# Altium PCB final_pcb.PcbDoc
Units mm, origin at the board's own origin, x right, y up, seen from the top; angles counter-clockwise.
Board outline 101.6 x 75.44 mm, 2 copper layers (Top Layer, Bottom Layer); 25 components, 40 nets, 169 pads, 27 vias.
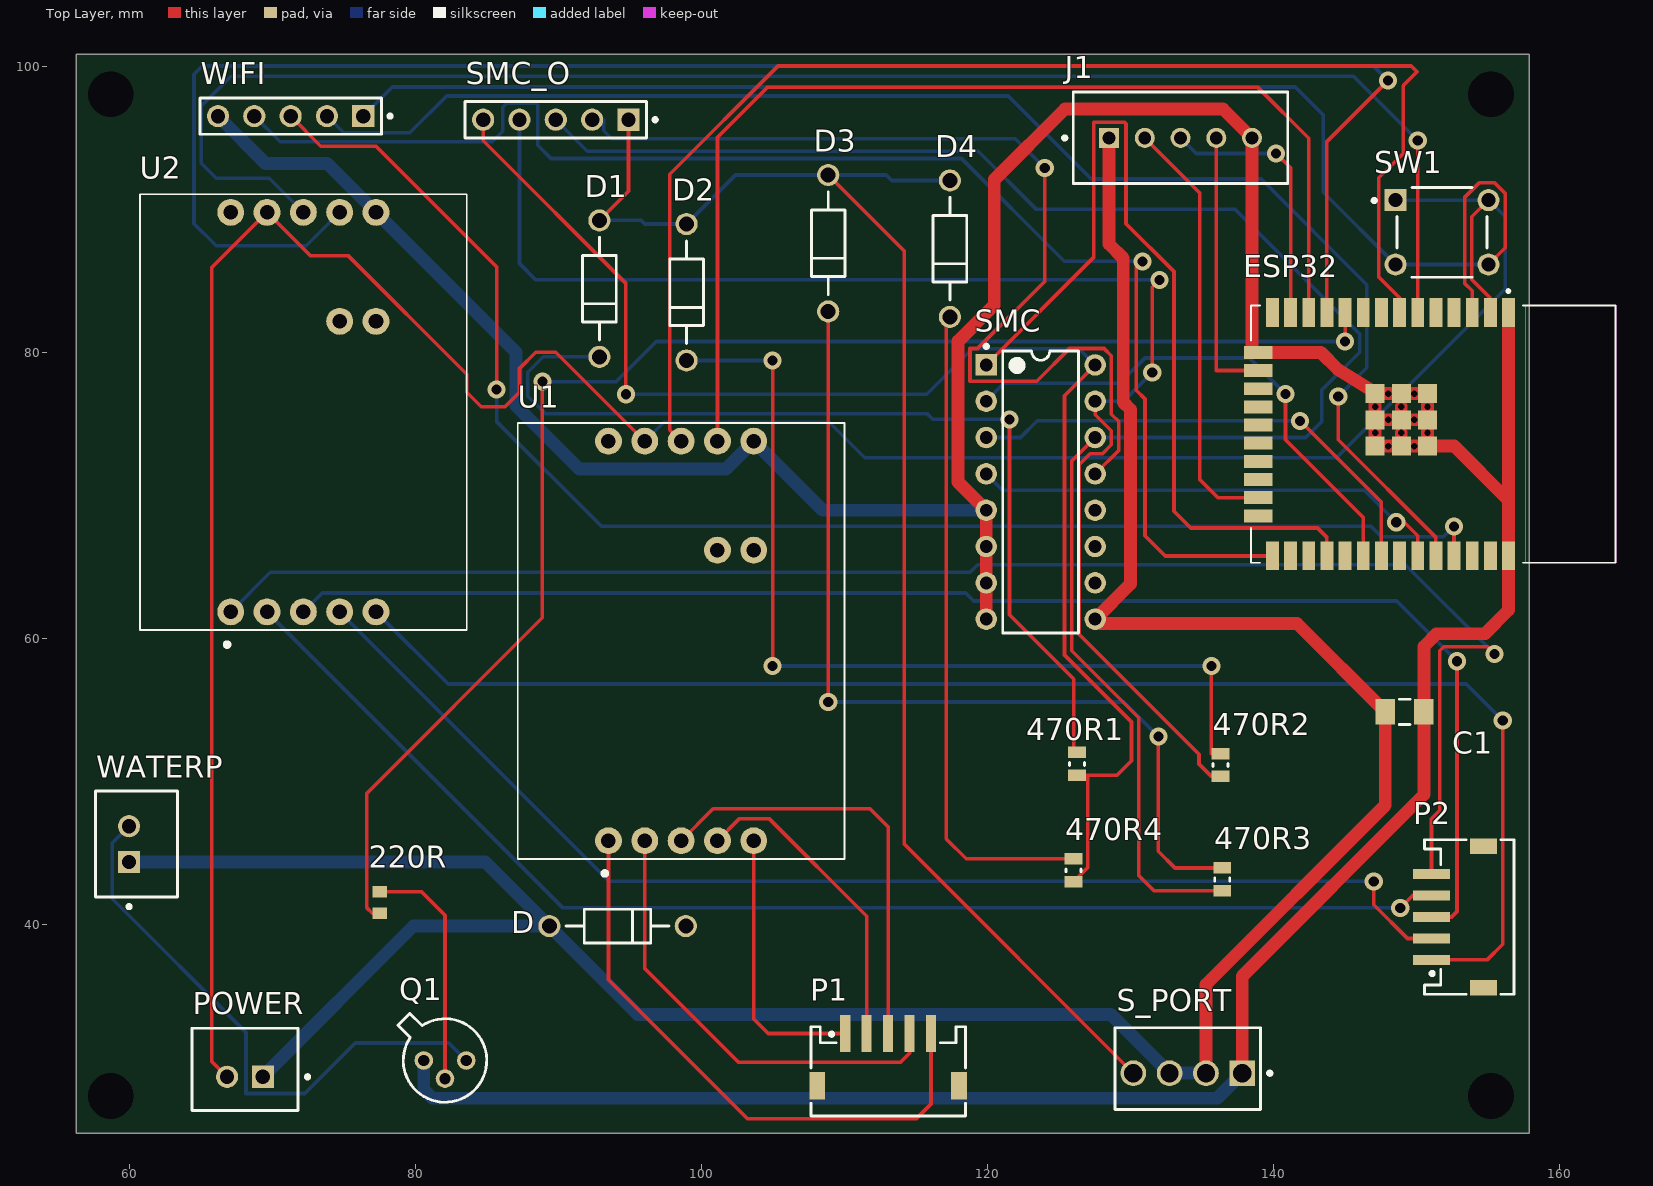
[diagram p0: Top Layer view]
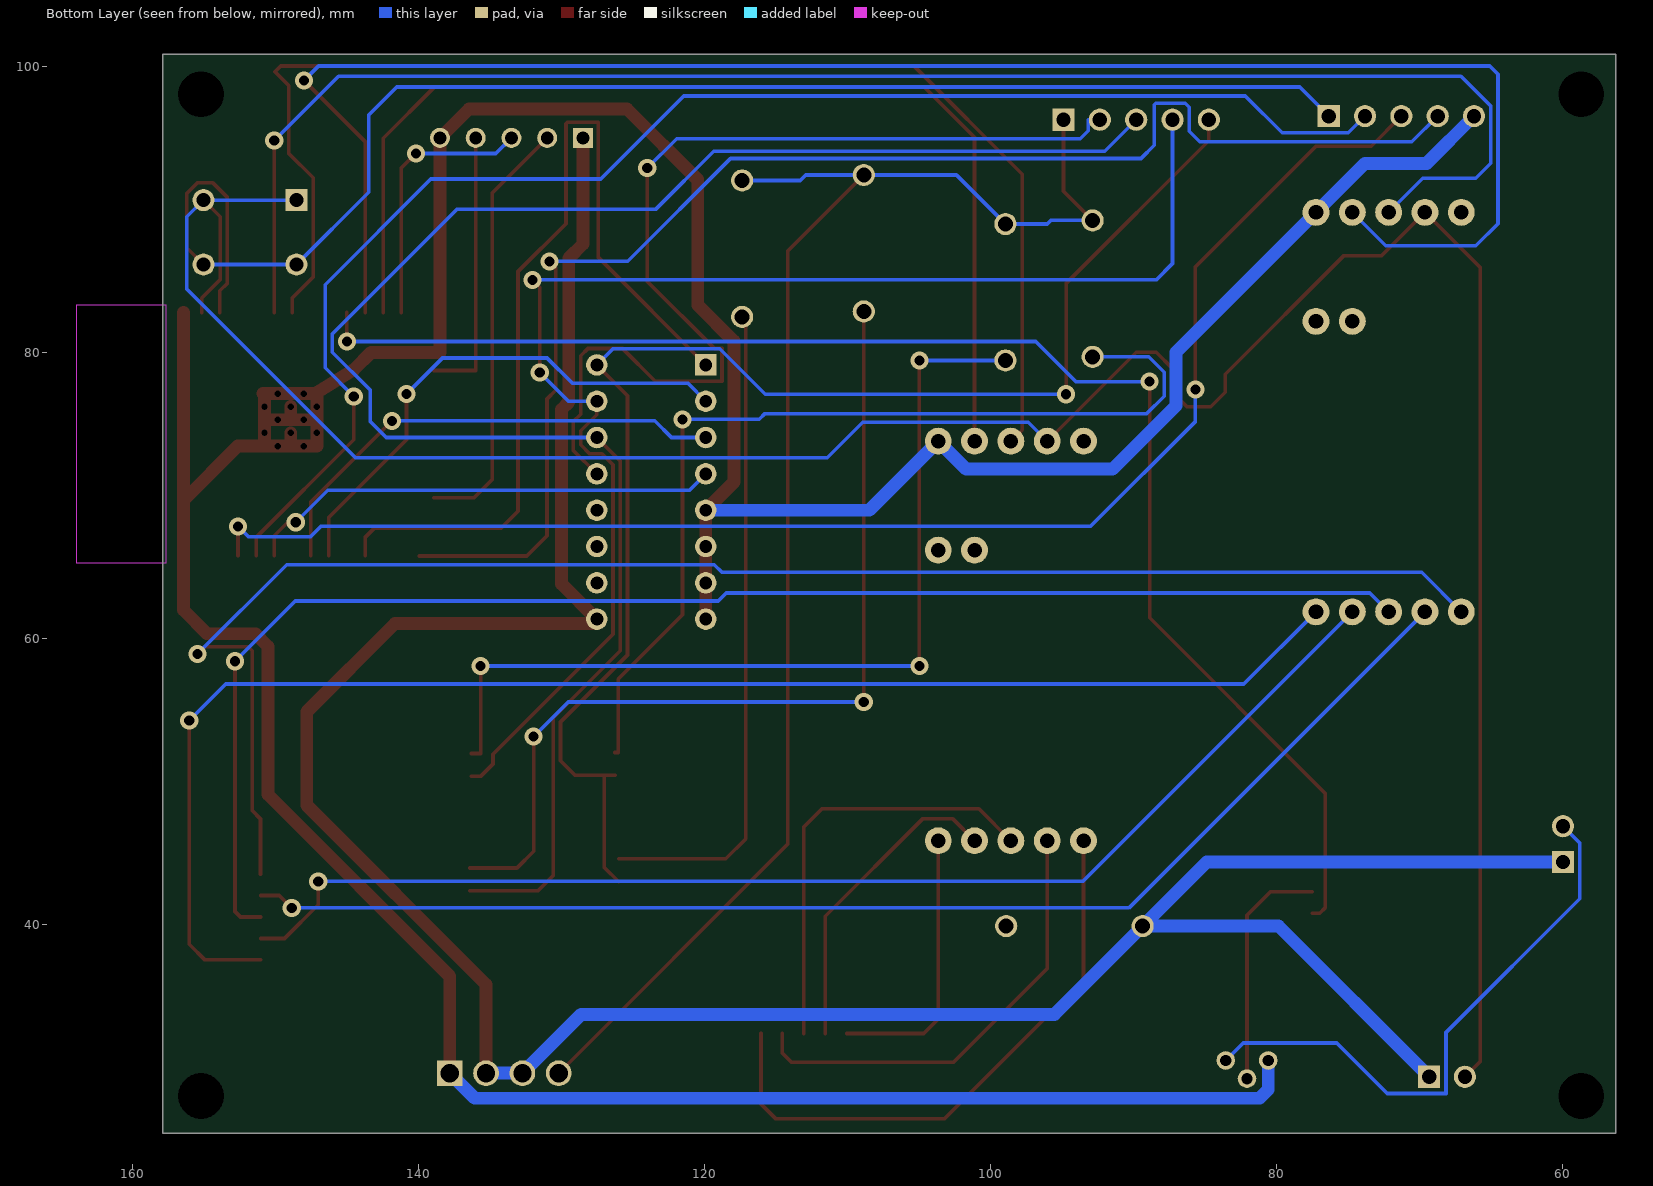
[diagram p1: Bottom Layer view, seen from below]
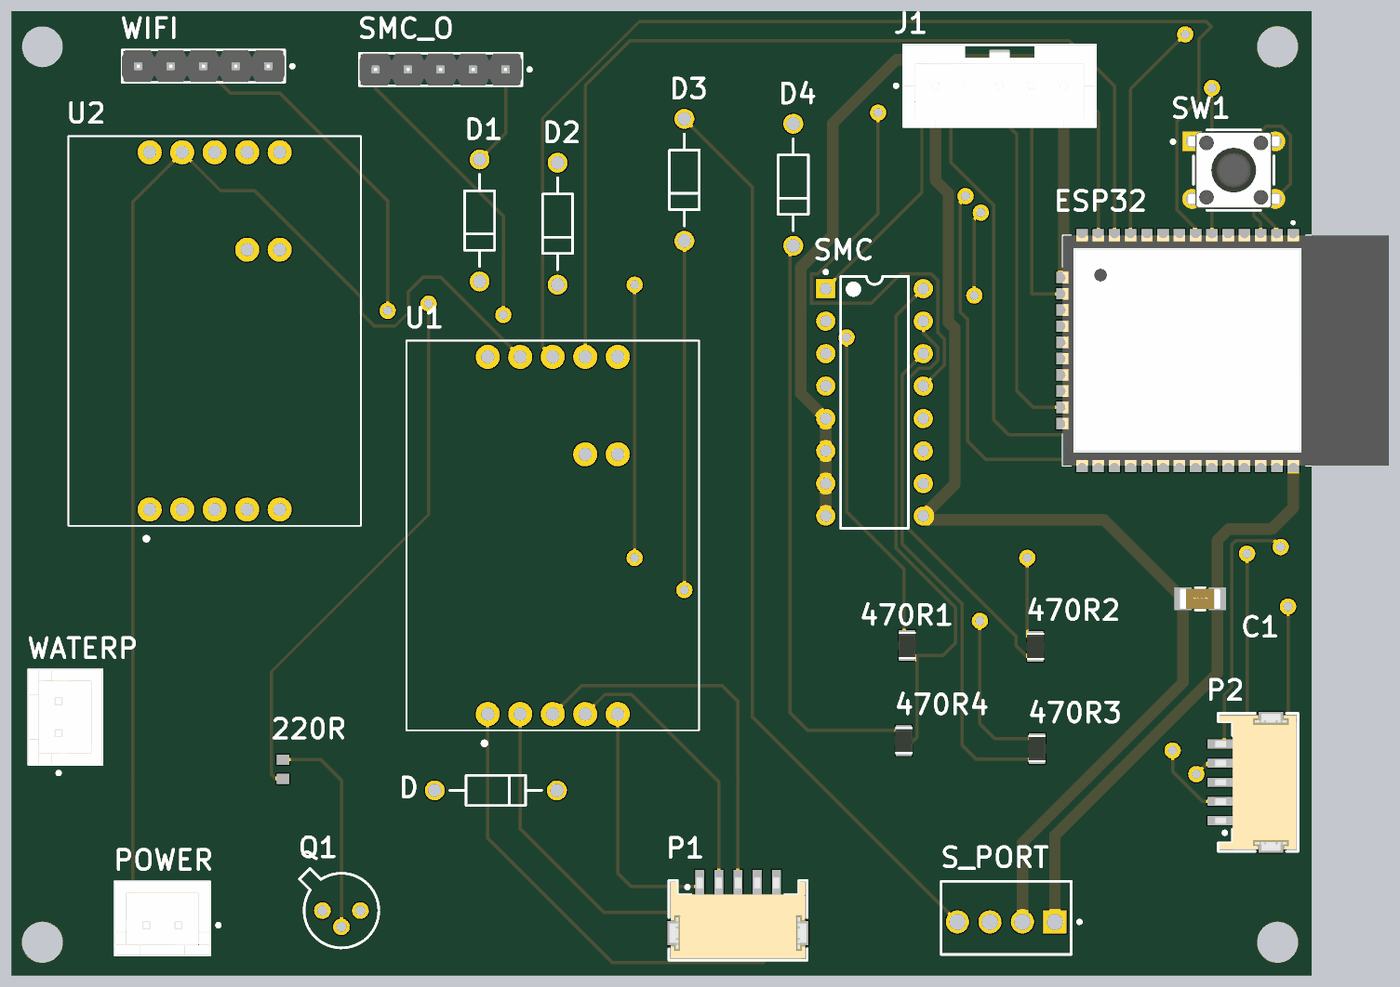
[diagram p2: 3D render of the assembled board from above, using the file's embedded part models]

## Layer stack, top to bottom
Top Solder: solder mask 0.0102, Solder Resist, Dk 3.5
Top Layer: signal copper 0.0356
Dielectric 1: dielectric 0.32, FR-4, Dk 4.8
Bottom Layer: signal copper 0.0356
Bottom Solder: solder mask 0.0102, Solder Resist, Dk 3.5

## Board outline
56.261,25.4 157.861,25.4 157.861,100.838 56.261,100.838

## Design rules (kind name [scope] priority, off if disabled: settings)
Clearance [All] p1: gap=0.254 ignorepadtopadclearanceinfootprint=FALSE
HoleSize [All] p1: absolutevalues=TRUE maxlimit=3.4 minlimit=0.45 maxpercent=80.000 minpercent=20.000
MinimumSolderMaskSliver [All] p1: minsoldermaskwidth=0.1
PolygonConnect [All] p1: connectstyle=Relief reliefconductorwidth=0.254 reliefentries=4 polygonreliefangle="90 Angle" airgapwidth=0.254
RoutingVias [All] p1: holewidth=0.711 width=1.27 viastyle="Through Hole" minholewidth=0.711 minwidth=1.27 maxholewidth=0.711 maxwidth=1.27
SilkToSolderMaskClearance [IsPad] p1: minsilkscreentomaskgap=0.15 clearancetoexposedcopper=TRUE
SolderMaskExpansion [All] p1: expansion=0.102 istentingtop=FALSE
SupplyNets "Schematic Supply Nets_2" [InNet('GND')] p1: voltage=0.000
SupplyNets "Schematic Supply Nets_1" [InNet('VCC')] p2: voltage=0.000
SupplyNets "Schematic Supply Nets" [InNet('3V3')] p3: voltage=0.000
Width Width_1 [InNet('GND')] p1: maxlimit=1 minlimit=0.254 preferedwidth=0.9 minimp=50.000000 maximp=50.000000 favimp=50.000000
Width VCC_Width [InNet('VCC')] p2: maxlimit=1.3 minlimit=0.5 preferedwidth=0.9 minimp=50.000000 maximp=50.000000 favimp=50.000000
Width [All] p3: maxlimit=1.3 minlimit=0.254 preferedwidth=0.254 minimp=50.000000 maximp=50.000000 favimp=50.000000
27 further rules are at their usual default settings.

## Components (designator, comment, footprint, x,y, rotation, side; value= is the part's Value field where it differs from the comment)
220R "RC0603FR-07220RL" RESC1608X55X25ML10T15 77.47,41.529 r90 top
470R1 "RC0805FR-07470RL" RESC2013X60X35LL10T20 126.238,51.219 r90 top
470R2 "RC0805FR-07470RL" RESC2013X60X35LL10T20 136.271,51.143 r90 top
470R3 "RC0805FR-07470RL" RESC2013X60X35LL10T20 136.398,43.142 r90 top
470R4 "RC0805FR-07470RL" RESC2013X60X35LL10T20 125.984,43.777 r90 top
C1 "EMK316BJ106MLHT" FP-1206-L_3_2_0_15-W_1_6-IPC_B 149.144,54.864 r0 top
D "1N4004" ONSC-AXIAL_LEAD-2-59-10_P 94.107,39.878 r180 top
D1 "1N4004" ONSC-AXIAL_LEAD-2-59-10_P 92.837,84.455 r90 top
D2 "1N4004" ONSC-AXIAL_LEAD-2-59-10_P 98.933,84.201 r90 top
D3 "1N4004" ONSC-AXIAL_LEAD-2-59-10_P 108.839,87.63 r90 top
D4 "1N4004" ONSC-AXIAL_LEAD-2-59-10_P 117.348,87.249 r90 top
ESP32 "ESP32-WROOM-32" MODULE_ESP32-WROOM-32 151.154,74.282 r270 top
J1 "B05B-XASK-1(LF)(SN)" FP-B05B-XASK-1_LF_SN-MFG 133.477,94.996 r180 top
P1 "648105131822" 648105131822 113.03,29.718 r0 top
P2 "648105131822" 648105131822 153.67,40.513 r90 top
POWER "B2B-XH-A(LF)(SN)" FP-B2B-XH-A_LF_SN-MFG 68.052,29.862 r180 top
Q1 "2N2222" MLTC-TO-18-3 82.042,30.48 r0 top
S_PORT "640456-4" TECO-640456-4 133.985,29.591 r0 top
SMC "ULN2003A" STM-DIP-16L 123.698,70.231 r0 top
SMC_O "90120-0125" FP-90120-0125-MFG 89.789,96.266 r180 top
SW1 "3-1825910-1" FP-3-1825910-1-MFG 151.765,88.392 r0 top
U1 "SEN-13879" SPARKFUN_SEN-13879 98.552,59.817 r90 top
U2 "SEN-13879" SPARKFUN_SEN-13879 72.136,75.819 r90 top
WATERP "B2B-XH-A(LF)(SN)" FP-B2B-XH-A_LF_SN-MFG 60.469,45.613 r90 top
WIFI "90120-0125" FP-90120-0125-MFG 71.247,96.52 r180 top

## Footprints (in the part's own frame and the unit in brackets; to place one, negate y for a bottom-side part, rotate by r counter-clockwise, add the part's x,y. Pads: shape width x height; smd on the part's side, far side on the other; paste and mask are expansions set on the pad)
648105131822 [mm] "1.50mm SMT Male Horizontal Shrouded Header, 5p"
  rect 0.7x2.6 smd: 1(-3,2.65) 2(-1.5,2.65) 3(0,2.65) 4(1.5,2.65) 5(3,2.65)
  rect 1.1x1.9 smd: MP1(-4.95,-1) MP2(4.95,-1)
  silkscreen extent -5.4,-3.13 5.4,3.13, body extent -5.35,-3 5.35,3.47, height 3.74
FP-3-1825910-1-MFG [mm]
  rect 1.54x1.54 hole 0.99 paste-2539.97 mask+0: 1(-3.25,2.25)
  round 1.54 hole 0.99 paste-2539.97 mask+0: 2(3.25,2.25) 3(-3.25,-2.25) 4(3.25,-2.25)
  silkscreen extent -4.87,-3.14 3.14,3.14, body extent -4.12,-3.24 4.12,3.24, height 0.25
FP-1206-L_3_2_0_15-W_1_6-IPC_B [mm]
  rect 1.355x1.758 smd paste+0 mask+0: 1(-1.351,0) 2(1.351,0)
  silkscreen extent -0.37,-0.88 0.37,0.88, body extent -2.28,-1.13 2.28,1.13, height 0.25
FP-90120-0125-MFG [mm]
  rect 1.55x1.55 hole 1 paste-2539.97 mask+0: 1(-5.08,0)
  round 1.55 hole 1 paste-2539.97 mask+0: 2(-2.54,0) 3(0,0) 4(2.54,0) 5(5.08,0)
  silkscreen extent -7.07,-1.27 6.35,1.27, body extent -6.45,-1.37 6.45,1.37, height 0.25
FP-B2B-XH-A_LF_SN-MFG [mm]
  rect 1.55x1.55 hole 1 paste-2539.97 mask+0: 1(-1.25,0.525)
  round 1.55 hole 1 paste-2539.97 mask+0: 2(1.25,0.525)
  silkscreen extent -4.5,-2.87 3.7,2.88, body extent -3.8,-2.98 3.8,2.98, height 0.25
FP-B05B-XASK-1_LF_SN-MFG [mm]
  rect 1.4x1.4 hole 0.9 paste-2539.97 mask+0: 1(5,0)
  round 1.4 hole 0.9 paste-2539.97 mask+0: 2(2.5,0) 3(0,0) 4(-2.5,0) 5(-5,0)
  silkscreen extent -7.5,-3.2 8.22,3.2, body extent -7.6,-3.3 7.6,3.3, height 0.25
MLTC-TO-18-3 [mm] "TO-18, 3-Leads"
  round 1.3 hole 0.8: 1(-1.485,0) 2(0,-1.27) 3(1.485,0)
  silkscreen extent -3.29,-2.92 2.92,3.29, body extent -3.29,-2.93 2.93,3.29, height 5.33
MODULE_ESP32-WROOM-32 [mm]
  rect 2x0.9 smd: 1(-8.5,5.26) 2(-8.5,3.99) 3(-8.5,2.72) 4(-8.5,1.45) 5(-8.5,0.18) 6(-8.5,-1.09) 7(-8.5,-2.36) 8(-8.5,-3.63) 9(-8.5,-4.9) 10(-8.5,-6.17) 11(-8.5,-7.44) 12(-8.5,-8.71) 13(-8.5,-9.98) 14(-8.5,-11.25) 25(8.5,-11.25) 26(8.5,-9.98) 27(8.5,-8.71) 28(8.5,-7.44) 29(8.5,-6.17) 30(8.5,-4.9) 31(8.5,-3.63) 32(8.5,-2.36) 33(8.5,-1.09) 34(8.5,0.18) 35(8.5,1.45) 36(8.5,2.72) 37(8.5,3.99) 38(8.5,5.26)
  rect 0.9x2 smd: 15(-5.715,-12.25) 16(-4.445,-12.25) 17(-3.175,-12.25) 18(-1.905,-12.25) 19(-0.635,-12.25) 20(0.635,-12.25) 21(1.905,-12.25) 22(3.175,-12.25) 23(4.445,-12.25) 24(5.715,-12.25)
  rect 1.33x1.33 smd: 39_1(-2.835,-0.405) 39_2(-1,-0.405) 39_3(0.835,-0.405) 39_4(-2.835,-2.24) 39_5(-1,-2.24) 39_6(0.835,-2.24) 39_7(-2.835,-4.075) 39_8(-1,-4.075) 39_9(0.835,-4.075)
  round 0.3 hole 0.45: 39_10(-1.918,-0.405) 39_11(-0.083,-0.405) 39_12(-2.835,-1.323) 39_13(-1,-1.323) 39_14(0.835,-1.323) 39_15(-1.918,-2.24) 39_16(-0.083,-2.24) 39_17(-2.835,-3.158) 39_18(-1,-3.158) 39_19(0.835,-3.158) 39_20(-1.918,-4.075) 39_21(-0.083,-4.075)
  Keep-Out Layer region: 9,6.45 -9,6.45 -9,12.75 9,12.75
  Keep-Out Layer region: 9,6.45 -9,6.45 -9,12.75 9,12.75
  silkscreen extent -10.1,-12.75 9,12.75, body extent -9,-12.75 9,12.75, height 3.2
ONSC-AXIAL_LEAD-2-59-10_P [mm] "AXIAL, 2-Leads, Diameter 2.35mm"
  round 1.55 hole 1.05: 1(-4.77,0) 2(4.77,0)
  silkscreen extent -3.6,-1.18 3.6,1.18
RESC1608X55X25ML10T15 [mm] "Chip Resistor, 2-Leads, Body 1.70x0.90mm, IPC Low Density"
  rect 0.8x1 smd: 1(-0.75,0) 2(0.75,0)
  body extent -0.85,-0.45 0.85,0.45, height 0.55
RESC2013X60X35LL10T20 [mm] "Chip Resistor, 2-Leads, Body 2.1x1.35mm, IPC High Density"
  rect 0.8x1.25 smd: 1(-0.8,0) 2(0.8,0)
  silkscreen extent -0.1,-0.53 0.1,0.53, body extent -1.05,-0.67 1.05,0.68, height 0.6
SPARKFUN_SEN-13879 [mil]
  round 74 hole 40: 1(-550,200) 2(-550,100) 3(-550,0) 4(-550,-100) 5(-550,-200) 6(550,-200) 7(550,-100) 8(550,0) 9(550,100) 10(550,200) 11(250,-100) 12(250,-200)
  silkscreen extent -646,-450 600,450
STM-DIP-16L [mm] "DIP, 16-Leads, Body 19.7x7.1mm, Pitch 2.54mm"
  rect 1.5x1.5 hole 0.9: 1(-3.81,8.89)
  round 1.5 hole 0.9: 2(-3.81,6.35) 3(-3.81,3.81) 4(-3.81,1.27) 5(-3.81,-1.27) 6(-3.81,-3.81) 7(-3.81,-6.35) 8(-3.81,-8.89) 9(3.81,-8.89) 10(3.81,-6.35) 11(3.81,-3.81) 12(3.81,-1.27) 13(3.81,1.27) 14(3.81,3.81) 15(3.81,6.35) 16(3.81,8.89)
  silkscreen extent -3.93,-9.85 2.65,10.31, body extent -3.95,-9.85 3.95,9.85, height 5.33
TECO-640456-4 [mm] "Through Hole, 4-Leads, Body 10.16x5.72mm, Pitch 2.54mm"
  rect 1.8x1.8 hole 1.27 paste-2539.97: 1(3.81,0)
  round 1.8 hole 1.27 paste-2539.97: 2(1.27,0) 3(-1.27,0) 4(-3.81,0)
  silkscreen extent -5.08,-2.54 5.86,3.18, body extent -5.08,-2.54 5.08,3.18, height 10.03

## Part data
220R: library part CMP-1659-00018-2, "General Purpose Chip Resistors, 220 Ohm, +/- 1%, -55 to 155 degC, 0603 (1608 Metric), RoHS, Tape and Reel", ComponentLink1Description="Manufacturer URL", ComponentLink1URL=http://www.yageo.com/, ComponentLink2Description=Datasheet, ComponentLink2URL=https://datasheet.ciiva.com/11808/0900766b80f96399-11808136.pdf, DatasheetVersion="Rev. 4, 04/2009", PackageDescription="2-Pin Surface Mount Device, Body 1.6 x 0.8 mm", PackageReference=0603, RoHSCompliant=false
470R1 470R2 470R3 470R4: library part CMP-2000-06961-1, "Chip Resistor, 470 Ohm, +/- 1%, 125 mW, -55 to 155 degC, 0805 (2012 Metric), RoHS, Tape and Reel", Manufacturer=Yageo, Package Description="2-Pin Surface Mounted Device, Body 2 x 1.25 mm", Package Reference=0805, Power Rating=250mW, Resistance=470ohm, Resistance Tolerance=±1%, Resistor Case Style=0805[2012Metric], Resistor Element Type=ThickFilm, Temperature Coefficient=±100ppm/°C, Voltage Rating=150V, Automotive Qualification Standard=-, Datasheet URL=http://www.yageo.com/documents/recent/PYu-RC_Group_51_RoHS_L_7.pdf, Datasheet Version="Rev. 7, 05/2017", Manufacturer URL=http://www.yageo.com/, Mounting Technology=SurfaceMount, MSL=MSL1-Unlimited, Packaging=Tape&Reel, Product Range=-, SVHC=ToBeAdvised
C1: library part CMP-14477-003677-2, "None"
D D1 D2 D3 D4: library part CMP-0902-00115-1, "Standard Recovery Rectifier, 2-Pin Axial_Lead, Pb-Free, Bulk Bag", Manufacturer="On Semiconductor", ComponentLink1Description="Manufacturer URL", ComponentLink1URL=http://www.onsemi.com/, ComponentLink2Description=Datasheet, ComponentLink2URL=http://www.onsemi.com/pub_link/Collateral/1N4001-D.PDF, ComponentLink3Description="Package Specification", ComponentLink3URL=http://www.onsemi.cn/pub_link/Collateral/59-10.PDF, DatasheetVersion="Rev. 13", IFSM Max (A)=30, IO(rec) Max (A)=1, Mounting Technology="Through Hole", PackageDescription="2-Pin, Axial Lead, Diameter 2.35 mm", PackageReference=AXIAL_LEAD-2-59-10, PackageVersion="Rev. U, 02/2005", Packing="Bulk Bag", PartNumber=1N4004, RoHS=TRUE, Type="Standard Recovery", VRRM Max (V)=400
ESP32: "Bluetooth, WiFi 802.11b/g/n, Bluetooth v4.2 +EDR, Class 1, 2 and 3 Transceiver Module 2.4GHz ~ 2.5GHz Antenna Not Included, U.FL Surface Mount", Package="Module Espressif Systems", Availability="In Stock", Check_prices=https://www.snapeda.com/parts/ESP32-WROOM-32/Espressif+Systems/view-part/?ref=eda, MF="Espressif Systems", MP=ESP32-WROOM-32, Price=None, Purchase-URL=https://pricing.snapeda.com/search/part/ESP32-WROOM-32/?ref=eda, SnapEDA_Link=https://www.snapeda.com/parts/ESP32-WROOM-32/Espressif+Systems/view-part/?ref=snap
J1: library part CMP-17439-000118-1, "CONN HEADER VERT 5POS 2.5MM", Color=Beige, Contact Resistance=10mR, Current Rating=3A, Flammability Rating="UL94 V-0", Insulation Color=Natural, Insulation Resistance=1GR, Max Operating Temperature=85°C, Min Operating Temperature=-25°C, Voltage Rating=250V, Connector Type=Header, Contact Finish - Mating=TIN, Contact Material="Copper Alloy", Contact Plating=Tin, Contact Shape=Circular, Contact Type="Male Pin", Fastening Type=Ramp, Gender=Male, Height=8.8mm, Insulation Material=Nylon, Lead Free="Lead Free", Lead Length=3.4mm, Length=15mm, Mated Stacking Heights=11.3mm, Material=Nylon, Mount="Through Hole", Number of Contacts=5, Number of Pins=5, Number of Poles=5, Number of Positions=5, Number of Rows=1, Orientation=Straight, Packaging=Bulk, Pitch=2.5mm, REACH SVHC="No SVHC", Series=XA, Termination=Solder, Voltage Rating (AC)=250V, Voltage Rating (DC)=250V, Width=6.4mm, Wire/Cable Gauge=20AWG
P1 P2: library part CMP-1502-00733-2, Color="Beige, White", Contact Resistance=20mΩ, Current Rating=1A, Flammability Rating="UL94 V-0", Insulation Resistance=500MΩ, Max Operating Temperature=85°C, Min Operating Temperature=-25°C, Operating Supply Voltage=50V, Connector Type="Male Pin", Contact Gender=Male, Contact Material=Copper, Contact Plating=Tin, Gender=Male, Height=3.7mm, Housing Material=Nylon, Lead Pitch=1.5mm, Length=10.5mm, Mount="Surface Mount", NexarPartId=18818254, Number of Contacts=5, Number of Pins=5, Number of Positions=5, Number of Rows=1, Packaging="Tape and Reel", Pitch=1.5mm, REACH SVHC=Unknown, RoHS=Compliant, Termination=Solder, Voltage Rating=50V, Width=10.5mm
POWER WATERP: library part CMP-2000-05888-3, "CONN HEADER VERT 2POS 2.5MM", Color=Natural, Contact Resistance=20mR, Current Rating=3A, Housing Color=White, Insulation Resistance=1GR, Max Operating Temperature=85°C, Max Voltage Rating (AC)=250V, Min Operating Temperature=-25°C, Connector Type="Male Pin", Contact Material=Brass, Contact Plating=Tin, Contact Type="Male Pin", Depth=5.75mm, Fastening Type=Detent, Housing Material=Polyamide, Lead Free="Lead Free", Lead Pitch=2.5mm, Length=7.4mm, Max Current Rating=3A, Max Voltage Rating (DC)=250V, Mount="Through Hole", Number of Contacts=2, Number of Positions=2, Number of Rows=1, Orientation=Straight, Packaging=Bulk, Pitch=2.5mm, REACH SVHC="No SVHC", Series=XH, Termination=Solder, Voltage Rating=250V, Voltage Rating (AC)=250V, Wire/Cable Gauge=22AWG
Q1: library part CMP-2000-05237-1, "Low Power Bipolar NPN Transistor, 30 V, -65 to 200 degC, 3-Pin TO-18, RoHS, Bulk", Collector Emitter Voltage V(br)ceo=30V, Collector Emitter Voltage Vces=400mV, Continuous Collector Current Ic Max=800mA, Current Ic @ Vce Sat=150mA, DC Current Gain hFE=100, Full Power Rating Temperature=25degC, Manufacturer=Multicomp, Package / Case=TO-18, Package Description="3-Pin Transistor Outline Package (TO-18), Dia 5.54 mm, Pitch Pitch 1.485mm", Package Reference=TO-18-3, Power Dissipation Pd=500mW, Voltage Vcbo=60V, Current Ic Continuous a Max=800mA, Current Ic hFE=150mA, Datasheet URL=http://www.farnell.com/datasheets/1662272.pdf, Datasheet Version="Rev. 1.1, 05/2012", DC Collector Current=800mA, Gain Bandwidth ft Min=250MHz, Gain Bandwidth ft Typ=250MHz, Hfe Min=100, Manufacturer URL=http://uk.farnell.com/b/multicomp, No. of Pins=3, No. of Transistors=1, Pin Configuration=a, Power Dissipation Ptot Max=500mW, SVHC=NoSVHC(19-Dec-2012), Transistor Case Style=TO-18, Transistor Polarity=NPN
S_PORT: library part CMP-2000-05419-1, "Male Header, Pitch 2.54 mm, 1 x 4 Position, Height 10.03 mm, Tail Length 3.56 mm, RoHS, Bulk", Color=White, Current, Rating="5 /  / A", Flammability Rating=UL94V-0, Manufacturer="TE Connectivity", Temperature, Operating="-55to+105 /  / degC", Voltage, Rating="250 /  / V", Agency Approvals=CSA,UL, Angle=Straight, Brand/Series=MTA-100Series, Color, Housing=White, Connector Type=MTA-100, Contact Centerline Spacing="0.100 /  / in.", Contact Mating Area Plating=Tin, Contact Plating=Tin, Contact Shape=Square, Contact Termination Area Plating=Tin, Datasheet URL=https://datasheet.ciiva.com/16286/eng-ds-82056-mta-0608-16286228.pdf, Datasheet Version=Dec-14, Length, Overall="0.4 /  / \"", Length, Pin="0.14 /  / \"", Length, Terminal Post="0.14 /  / in.", Manufacturer URL=http://www.te.com/, Material, Contact=CopperAlloy, Material, Housing=Polyester, Mount Angle=Vertical, Mounting Hole Size="0.04 /  / \"", Mounting Type=PCMount, Number of Contacts=4, Number of Positions=4, Number of Rows=1, Pin Spacing="0.1 /  / \"", Primary Type=InterconnectSystem, Size, Post="0.025 /  / in.", Special Features=Pinstrip, Standards=RoHSCompliant,ELVCompliant,UL94V-0, Termination=Solder, Type=PCBPlug
SMC: library part CMP-2000-07351-1, "Seven Darlington Array, 50 V, 0.5 A, -40 to 85 degC, 16-Pin DIP, RoHS, Tube", Collector Emitter Voltage V(br)ceo=50V, DC Collector Current=500mA, DC Current Gain hFE=1000hFE, Manufacturer=STMicroelectronics, Operating Temperature Max=85°C, Output Current=0.5A, Package Description="16-Pin DIP, Body 19.7 x 7.1 mm, Pitch 2.54 mm", Package Reference=DIP-16L, Power Dissipation Pd=-, Transistor Case Style=DIP, Automotive Qualification Standard=-, Datasheet URL=http://www2.st.com/content/ccc/resource/technical/document/datasheet/f3/6e/c8/64/4d/b3/4e/38/CD00001244.pdf/files/CD00001244.pdf/jcr:content/translations/en.CD00001244.pdf, Datasheet Version="Rev. 8, 06/2012", Manufacturer URL=http://www.st.com/, Mounting Technology=ThroughHole, MSL=MSL2-1year, No. of Pins=16Pins, PartNumber=ULN2003A, Product Range=-, SVHC=NoSVHC(17-Dec-2015), Transistor Polarity=NPN, VOUT=50V
SMC_O WIFI: library part CMP-00257-00655425-1, "90120-0125 2.54mm Pitch C-Grid III Header, Single Row, Vertical, 5 Circuits, Tin (Sn) Plating", Contact Resistance=20mΩ, Current Rating=3A, Housing Color=Black, Manufacturer Lifecycle Status=ACTIVE, Max Operating Temperature=125°C, Max Voltage Rating (DC)=350.35kV, Min Operating Temperature=-55°C, Voltage Rating=350V, Contact Gender=Male, Contact Material=Brass, Contact Plating=Tin, Country of Origin=SK, Gender=Male, Glow Wire Compliant=Non-compliant, Housing Material=Polyester, Lead Free="Lead Free", Lead Length=2.9mm, Lead Pitch=2.54mm, Lifecycle Status=Production, Mating Post Length=6.75mm, Mount="Through Hole", NexarPartId=655425, Number of Circuits=5, Number of Contacts=5, Number of Pins=5, Number of Positions=5, Number of Rows=1, Orientation=Vertical, Packaging=Bulk, Pitch=2.54mm, Plating=Tin, Radiation Hardening=No, REACH SVHC="No SVHC", RoHS=Compliant, Schedule B=8536694040, Termination=Solder, Voltage Rating (AC)=350V
SW1: library part CMP-03407-000001-1, "SWITCH TACTILE SPST-NO 0.05A 24V", Contact Current Rating=50mA, Contact Resistance=100mΩ, Manufacturer="TE Connectivity", Operating Force=160gf, Package=0, Temperature="-35°C to +85°C", Temperature Range High=+85°C, Temperature Range Low=-35°C, Automotive=No, Category=Switch, ComponentLink2Description=Datasheet, ComponentLink2URL=https://www.te.com/commerce/DocumentDelivery/DDEController?Action=srchrtrv&DocNm=1825910&DocType=Customer+Drawing&DocLang=English, Device Class L1=Electromechanical, Device Class L2=Switches, Device Class L3="Tactile Switches", Digikey Description="SWITCH TACTILE SPST-NO 0.05A 24V", Electromechanical Life=100000Cycles, Height=17.3mm, Lead Free=Yes, Manufacturer Part Number=3-1825910-1, Mount="Through Hole", Octopart=https://octopart.com/3-1825910-1-te+connectivity-46506874, RoHS=TRUE, Throw Configuration=SPST-NO
U1 U2: "Load Cell Amp Hx711", Package=None, Availability=Unavailable, MP=SEN-13879, Price=None

## Free pads (board coordinates)
  round 1.524 hole 3.2 unplated: 10(58.674,98.044)
  round 1.524 hole 3.2: 11(155.194,98.044) 12(58.674,28) 13(155.194,28)

## Via types
v1: diameter 1.27, hole 0.711, Top Layer to Bottom Layer, 27 vias

## Nets (pads, with @x,y where several pads share a name; then routed paths per layer and width w, separated by ;. In a path a pad name is that pad's centre, name@x,y a point inside that pad or via, vN(x,y) a via of type N, cw(c..) or ccw(c..) an arc to the next point about the centre after c; other vN are vias at no path point)
3V3: ESP32.2 POWER.2 SW1.1 SW1.2 U1.9 U2.9 | length 189.1
  Top Layer w0.254: POWER.2 65.735,30.404 65.735,85.928 U2.9 72.619,86.766 75.26,86.766 83.566,78.461 83.566,77.216 84.582,76.2 86.233,76.2 87.249,77.216 87.249,78.867 88.392,80.01 89.789,80.01 U1.9 ; SW1.2 153.848,89.475 153.848,85.09 155.144,83.794 ESP32.2
  Bottom Layer w0.254: U1.9 97.333,75.108 108.915,75.108 111.391,72.632 144.387,72.632 156.185,84.43 156.185,89.472 SW1.2 SW1.1
7: ESP32.11 U2.7 | length 124.4
  Top Layer w0.254: ESP32.11 143.714,94.743 v1(147.98,99.009)
  Bottom Layer w0.254: U2.7 72.339,87.452 66.04,87.452 64.491,89.002 64.491,99.441 65.075,100.025 146.964,100.025 v1(147.98,99.009)
8: ESP32.6 U2.8 | length 112.4
  Top Layer w0.254: ESP32.6 v1(150.063,94.818)
  Bottom Layer w0.254: U2.8 69.748,92.177 66.04,92.177 64.999,93.218 64.999,97.231 67.081,99.314 145.567,99.314 v1(150.063,94.818)
9: ESP32.7 U1.8 | length 93.1
  Top Layer w0.254: U1.8 97.765,74.574 97.765,92.456 105.334,100.025 149.606,100.025 150.012,99.619 149.047,98.654 149.047,93.904 147.345,92.202 147.345,85.269 148.794,83.82 ESP32.7
10: ESP32.12 U1.7 | length 77.7
  Top Layer w0.254: U1.7 101.092,95.047 104.572,98.527 138.887,98.527 142.444,94.97 ESP32.12
13: ESP32.16 J1.4 | length 19.2
  Top Layer w0.254: J1.4 135.977,78.742 135.992,78.728 ESP32.16
14: ESP32.13 J1.3 | length 18.7
  Top Layer w0.254: v1(140.157,93.904) 141.174,92.887 ESP32.13
  Bottom Layer w0.254: J1.3 134.569,93.904 v1(140.157,93.904)
15: ESP32.23 J1.2 | length 30.1
  Top Layer w0.254: J1.2 134.81,91.163 134.81,71.12 136.093,69.838 ESP32.23
ENA: ESP32.3 SW1.3 SW1.4 WIFI.1 | length 105.1
  Top Layer w0.254: ESP32.3 153.874,84.302 153.34,84.836 153.34,90.83 154.356,91.846 155.448,91.846 156.185,91.11 156.185,87.312 SW1.4
  Bottom Layer w0.254: WIFI.1 78.359,98.552 141.503,98.552 143.459,96.596 143.459,91.198 SW1.3 SW1.4
GND: C1.2 ESP32.1 ESP32.15 ESP32.38 ESP32.39_1 ESP32.39_2 ESP32.39_3 ESP32.39_4 ESP32.39_5 ESP32.39_6 ESP32.39_7 ESP32.39_8 ESP32.39_9 ESP32.39_10 ESP32.39_11 ESP32.39_12 ESP32.39_13 ESP32.39_14 ESP32.39_15 ESP32.39_16 ESP32.39_17 ESP32.39_18 ESP32.39_19 ESP32.39_20 ESP32.39_21 J1.5 Q1.1 S_PORT.1 SMC.5 SMC.6 SMC.7 SMC.8 U1.6 U2.6 WIFI.5 | length 297.9
  Top Layer w0.9: SMC.8 SMC.7 SMC.6 SMC.5 117.926,70.923 117.926,80.781 120.447,83.302 120.447,92.076 125.395,97.024 136.449,97.024 J1.5 138.477,79.998 ESP32.15 143.282,79.998 144.487,78.792 147.079,77.204 ESP32.39_7 ; S_PORT.1 137.795,36.373 150.495,49.073 C1.2 150.495,59.436 151.384,60.325 154.763,60.325 156.414,61.976 ESP32.38 156.414,67.87 156.414,69.647 ; ESP32.39_16 ESP32.39_6 ; ESP32.39_15 ESP32.39_5 ; ESP32.39_1@150.854,77.117 ESP32.39_1 ; ESP32.39_3@150.867,73.448 ESP32.39_3 ; ESP32.1 156.414,69.647 ; ESP32.39_8 ESP32.39_21 147.079,73.787 ESP32.39_9 ESP32.39_19 ESP32.39_6 ; ESP32.39_8 ESP32.39_20 ESP32.39_7 ; ESP32.39_8 ESP32.39_18 ESP32.39_5 ; ESP32.39_7 ESP32.39_17 148.568,77.117 ESP32.39_4 ESP32.39_12 ESP32.39_1 ; ESP32.39_6 149.038,73.448 ESP32.39_14 ESP32.39_3 ; ESP32.39_5 ESP32.39_13 150.416,75.283 ESP32.39_2 ; ESP32.39_3 152.613,73.448 156.414,69.647 ; ESP32.39_3 ESP32.39_11 ESP32.39_2 ; ESP32.39_2 ESP32.39_10 ESP32.39_1
  Bottom Layer w0.9: WIFI.5 69.469,93.218 73.787,93.218 U2.6 87.002,80.003 87.002,76.269 91.44,71.831 101.676,71.831 U1.6 108.458,68.961 SMC.5 ; Q1.1 80.557,28.448 81.167,27.838 136.042,27.838 S_PORT.1
GPIO0: ESP32.25 WIFI.4 | length 100.3
  Top Layer w0.254: v1(130.81,86.36) 130.378,85.928 130.378,77.342 130.988,76.732 130.988,67.183 132.41,65.761 139.904,65.761 ESP32.25
  Bottom Layer w0.254: WIFI.4 70.51,94.717 85.344,94.717 86.081,95.453 86.081,97.143 86.36,97.422 88.417,97.422 88.519,97.32 88.519,94.488 89.451,93.556 118.153,93.556 125.349,86.36 v1(130.81,86.36)
GPIO25: 220R.1 ESP32.10 | length 102.2
  Top Layer w0.254: 220R.1 76.95,40.779 76.581,41.148 76.581,49.174 88.849,61.443 v1(88.849,77.953) ; v1(144.984,80.76) ESP32.10
  Bottom Layer w0.254: v1(88.849,77.953) 94.005,77.953 96.813,80.76 v1(144.984,80.76)
IN1: ESP32.28 SMC.1 | length 63.6
  Top Layer w0.254: SMC.1 127.396,86.629 127.396,96.088 129.565,96.088 129.667,95.987 129.667,89.002 133.02,85.649 133.02,68.885 134.188,67.716 143.054,67.716 143.714,67.056 ESP32.28
IN2: ESP32.30 SMC.2 | length 36.8
  Top Layer w0.254: v1(140.818,77.089) 140.818,73.889 146.254,68.452 ESP32.30
  Bottom Layer w0.254: SMC.2 121.158,77.851 129.235,77.851 130.988,79.604 138.303,79.604 v1(140.818,77.089)
IN3: ESP32.31 SMC.3 | length 34.2
  Top Layer w0.254: v1(141.834,75.209) 147.524,69.519 ESP32.31
  Bottom Layer w0.254: SMC.3 122.289,74.041 123.457,75.209 v1(141.834,75.209)
IN4: ESP32.33 SMC.4 | length 33.4
  Top Layer w0.254: v1(148.565,68.123) 149.124,68.123 150.064,67.183 ESP32.33
  Bottom Layer w0.254: SMC.4 121.031,70.358 146.329,70.358 v1(148.565,68.123)
Net220R_2: 220R.2 Q1.2 | length 16.7
  Top Layer w0.254: 220R.2 80.403,42.279 82.042,40.64 Q1.2
Net470R1_1: 470R1.1 470R4.1 SMC.16 SMC_O.5 | length 100.6
  Top Layer w0.254: SMC_O.5 84.709,94.793 94.691,84.811 v1(94.691,77.064) ; 470R4.1 127,43.993 127,50.419 ; 470R1.1 127,50.419 ; SMC.16 125.361,76.974 125.361,58.836 130.048,54.149 130.048,51.435 129.032,50.419 127,50.419
  Bottom Layer w0.254: v1(94.691,77.064) 115.722,77.064 118.911,80.252 126.377,80.252 SMC.16
Net470R1_2: 470R1.2 D1.1 | length 66.9
  Top Layer w0.254: v1(121.514,75.311) 121.514,61.646 126.009,57.15 126.009,52.019 470R1.2
  Bottom Layer w0.254: D1.1 88.905,79.685 87.833,78.613 87.833,76.937 89.052,75.717 115.748,75.717 116.154,75.311 v1(121.514,75.311)
Net470R2_1: 470R2.1 SMC.15 SMC_O.4 | length 99.4
  Top Layer w0.254: SMC.15 127.508,75.64 128.639,74.509 128.639,73.533 128.016,72.91 127.151,72.91 126.377,72.136 126.377,60.288 134.772,51.892 134.772,51.207 135.636,50.343 470R2.1 ; v1(131.496,78.588) 131.496,84.557 v1(132.004,85.065)
  Bottom Layer w0.254: SMC_O.4 87.249,86.208 88.392,85.065 v1(132.004,85.065) ; SMC.15 129.489,76.581 v1(131.496,78.588)
Net470R2_2: 470R2.2 D2.1 | length 64.8
  Top Layer w0.254: v1(104.953,58.064) v1(104.953,79.431) ; v1(135.636,58.064) 135.636,51.943 470R2.2
  Bottom Layer w0.254: D2.1 v1(104.953,79.431) ; v1(104.953,58.064) v1(135.636,58.064)
Net470R3_1: 470R3.1 SMC.14 SMC_O.3 | length 125.5
  Top Layer w0.254: SMC.14 125.869,72.402 125.869,59.138 130.556,54.451 130.556,43.409 131.623,42.342 470R3.1
  Bottom Layer w0.254: SMC_O.3 91.991,94.064 119.321,94.064 123.368,90.018 137.262,90.018 146,81.28 146,80.01 143.358,77.368 143.358,75.159 142.24,74.041 SMC.14
Net470R3_2: 470R3.2 D3.1 | length 64.4
  Top Layer w0.254: v1(108.839,55.55) D3.1 ; v1(131.928,53.137) 131.928,45.11 133.096,43.942 470R3.2
  Bottom Layer w0.254: v1(108.839,55.55) 129.515,55.55 v1(131.928,53.137)
Net470R4_2: 470R4.2 D4.1 | length 46.1
  Top Layer w0.254: D4.1 117.095,82.226 117.095,45.973 118.491,44.577 470R4.2
NetD1_2: D1.2 D2.2 D3.2 D4.2 S_PORT.4 SMC_O.1 | length 105.7
  Top Layer w0.254: D1.2 94.869,91.257 SMC_O.1 ; D3.2 114.148,87.091 114.148,45.618 S_PORT.4
  Bottom Layer w0.254: D1.2 95.758,89.225 96.012,88.971 D2.2 102.362,92.4 D3.2 112.903,92.4 113.284,92.019 D4.2
NetP1_1: P1.1 U1.5 | length 19.3
  Top Layer w0.254: U1.5 103.632,33.384 104.648,32.368 P1.1
NetP1_2: P1.2 U1.4 | length 22.1
  Top Layer w0.254: U1.4 102.641,47.396 104.699,47.396 111.53,40.565 P1.2
NetP1_3: P1.3 U1.3 | length 30.4
  Top Layer w0.254: U1.3 100.787,48.082 111.76,48.082 113.03,46.812 P1.3
NetP1_4: P1.4 U1.2 | length 31.8
  Top Layer w0.254: U1.2 96.012,36.906 102.565,30.353 113.895,30.353 114.53,30.988 P1.4
NetP1_5: P1.5 U1.1 | length 41.7
  Top Layer w0.254: U1.1 93.472,36.119 103.175,26.416 115.014,26.416 116.03,27.432 P1.5
NetP2_1: P2.1 U2.5 | length 103
  Top Layer w0.254: P2.1 154.912,37.513 156.007,38.608 v1(156.007,54.254)
  Bottom Layer w0.254: U2.5 82.263,56.802 153.459,56.802 v1(156.007,54.254)
NetP2_2: P2.2 U2.4 | length 86.8
  Top Layer w0.254: v1(146.99,43.002) 146.99,41.375 149.352,39.013 P2.2
  Bottom Layer w0.254: U2.4 93.523,43.002 v1(146.99,43.002)
NetP2_3: P2.3 U2.3 | length 102.6
  Top Layer w0.254: P2.3 152.425,40.513 152.806,40.894 v1(152.806,58.395)
  Bottom Layer w0.254: U2.3 73.457,63.17 118.466,63.17 119.024,62.611 148.59,62.611 v1(152.806,58.395)
NetP2_4: P2.4 U2.2 | length 90.4
  Top Layer w0.254: v1(148.844,41.148) 149.709,42.013 P2.4
  Bottom Layer w0.254: U2.2 90.297,41.148 v1(148.844,41.148)
NetP2_5: P2.5 U2.1 | length 112.3
  Top Layer w0.254: P2.5 151.028,43.513 151.028,47.371 151.613,47.955 151.613,59.131 151.892,59.411 154.94,59.411 v1(155.435,58.915)
  Bottom Layer w0.254: U2.1 69.825,64.618 118.757,64.618 119.29,65.151 149.2,65.151 v1(155.435,58.915)
NetQ1_3: Q1.3 WATERP.2 | length 40.4
  Bottom Layer w0.254: WATERP.2 58.776,45.695 58.776,41.783 68.123,32.436 68.123,28.169 72.238,28.169 75.768,31.699 82.308,31.699 Q1.3
NetSMC_13: SMC.13 SMC_O.2 | length 71.1
  Top Layer w0.254: v1(123.977,92.888) 123.977,84.956 119.285,80.264 118.757,80.264 118.757,77.978 123.419,77.978 125.705,80.264 128.131,80.264 128.639,79.756 128.639,75.68 129.147,75.172 129.147,73.14 SMC.13
  Bottom Layer w0.254: SMC_O.2 93.142,96.266 93.142,95.504 93.701,94.945 121.92,94.945 v1(123.977,92.888)
RX: ESP32.34 WIFI.2 | length 102.4
  Top Layer w0.254: v1(144.501,76.911) 144.501,73.889 151.334,67.056 ESP32.34
  Bottom Layer w0.254: WIFI.2 74.955,95.352 79.578,95.352 82.157,97.93 121.419,97.93 127.223,92.126 139.116,92.126 146.508,84.734 146.508,78.919 v1(144.501,76.911)
TX: ESP32.35 WIFI.3 | length 102.2
  Top Layer w0.254: WIFI.3 73.355,94.412 77.216,94.412 85.649,85.979 v1(85.649,77.394) ; ESP32.35 v1(152.604,67.83)
  Bottom Layer w0.254: v1(85.649,77.394) 85.649,75.159 92.977,67.83 146.792,67.83 147.524,67.098 151.872,67.098 v1(152.604,67.83)
VCC: C1.1 D.2 J1.1 POWER.1 S_PORT.2 S_PORT.3 SMC.9 WATERP.1 | length 194.7
  Top Layer w0.9: J1.1 128.477,87.575 129.47,86.582 129.47,76.511 129.978,76.003 129.978,63.811 SMC.9 127.508,61.041 141.615,61.041 C1.1 147.792,48.326 135.255,35.789 S_PORT.2
  Bottom Layer w0.9: WATERP.1 84.852,44.363 D.2 ; POWER.1 79.843,39.878 D.2 ; S_PORT.2 S_PORT.3 128.6,33.706 95.509,33.706 D.2
pads on no net: D.1 ESP32.4 ESP32.5 ESP32.8 ESP32.9 ESP32.14 ESP32.17 ESP32.18 ESP32.19 ESP32.20 ESP32.21 ESP32.22 ESP32.24 ESP32.26 ESP32.27 ESP32.29 ESP32.32 ESP32.36 ESP32.37 P1.MP1 P1.MP2 P2.MP1 P2.MP2 SMC.10 SMC.11 SMC.12 U1.10 U1.11 U1.12 U2.10 U2.11 U2.12

## Text inside footprints (layer, text, board x,y; h text height)
ESP32: Mechanical 13 "ANTENNA" at 160.154,80.282 h1.78 r270